# EAGLE board ramanPi_imagingBoard_ccdBoard (EAGLE 6.2)
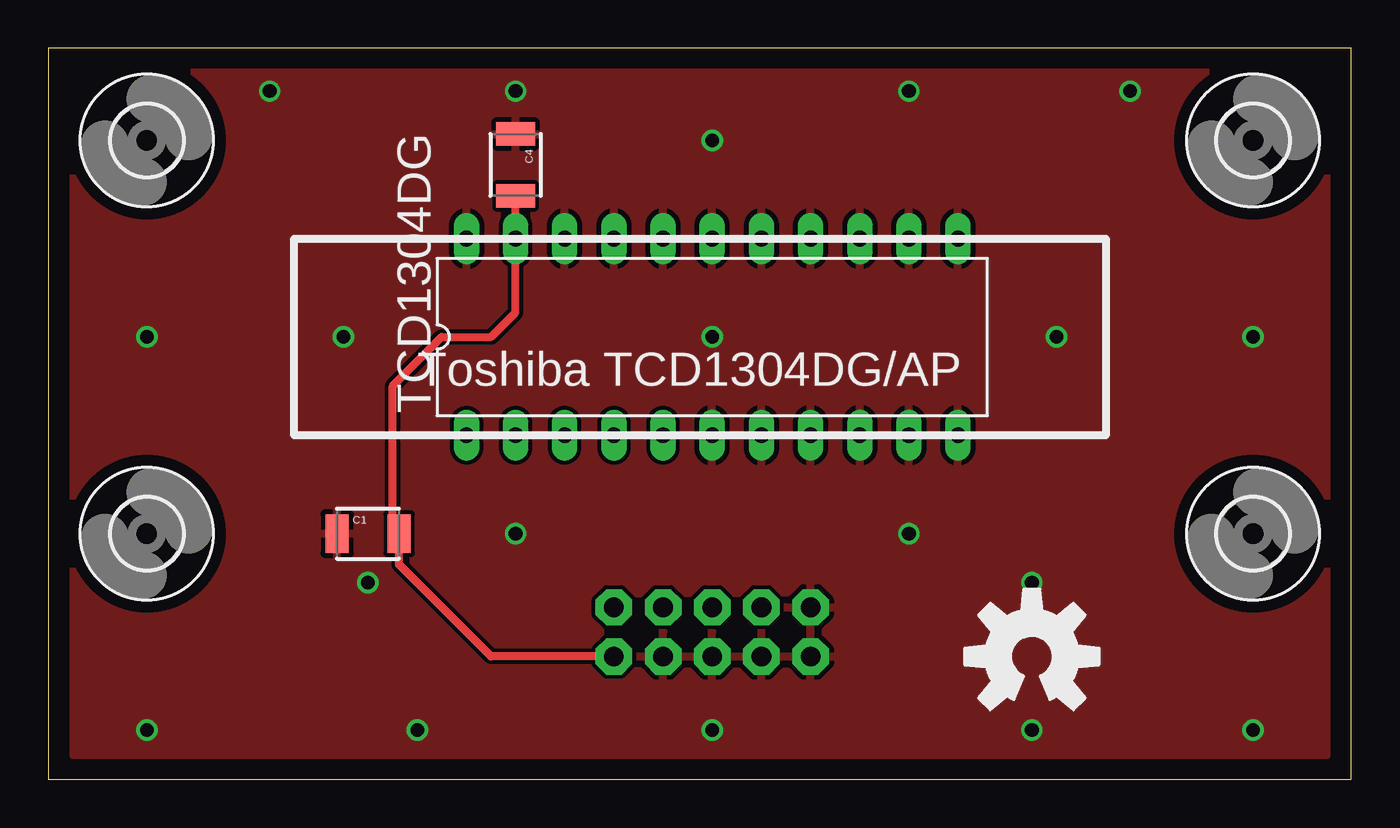
[diagram p0: board, top side]
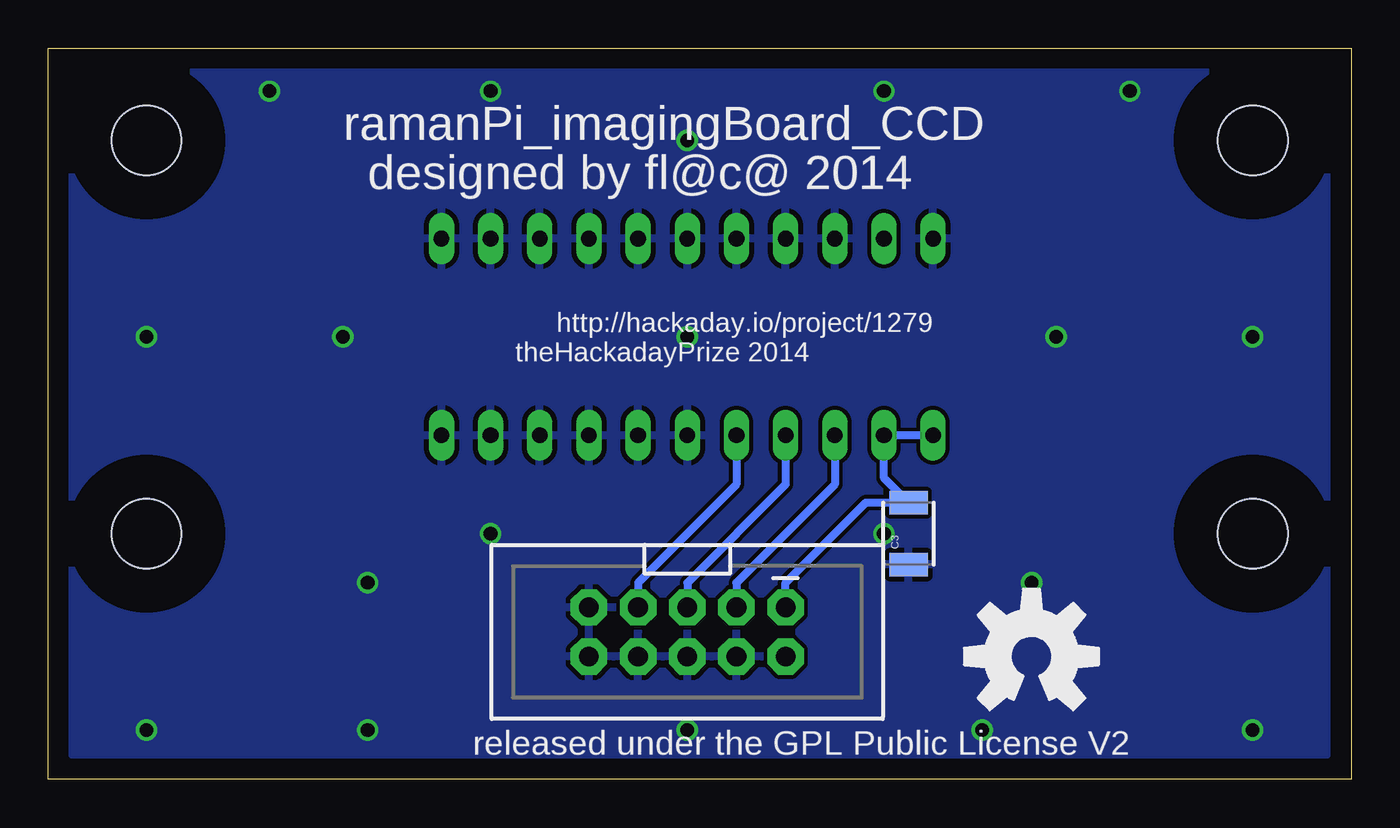
[diagram p1: board, bottom side, seen from below]

Size 67.29 x 37.77 mm. Coordinates in mm from the lower left corner, seen from the top.
Outline: 0,0 67.29,0 67.29,37.77 0,37.77 0,0
Copper layers (1*16): Top 0.035mm / dielectric 1.5mm / Bottom 0.035mm
Design rules: minimum track width 10mil, minimum drill 24mil, track to track 8mil, track to pad 8mil, pad to pad 8mil, via to via 8mil, smd to smd 8mil, copper to edge 40mil, drill to drill 8mil, minimum pad ring 10mil, minimum via ring 8mil, stop-mask expansion 4mil, vias tented up to drill 0mil, thermal gap 10mil

## Footprints (pad centres in the part's own frame; a part is rotated, then mirrored left to right if it is on the bottom)
1210 = smd 1.2 x 2: 1 -1.6,0; 2 1.6,0
3,6 = hole 3.6: 0,0
2X5-SHROUDED = drill 1.016 pad 1.88 octagon: 1 -1.27,5.08; 2 1.27,5.08; 3 -1.27,2.54; 4 1.27,2.54; 5 -1.27,0; 6 1.27,0; 7 -1.27,-2.54; 8 1.27,-2.54; 9 -1.27,-5.08; 10 1.27,-5.08
DIL22-4 = drill 0.813 long: 1 -12.7,-5.08; 2 -10.16,-5.08; 3 -7.62,-5.08; 4 -5.08,-5.08; 5 -2.54,-5.08; 6 0,-5.08; 7 2.54,-5.08; 8 5.08,-5.08; 9 7.62,-5.08; 10 10.16,-5.08; 11 12.7,-5.08; 12 12.7,5.08; 13 10.16,5.08; 14 7.62,5.08; 15 5.08,5.08; 16 2.54,5.08; 17 0,5.08; 18 -2.54,5.08; 19 -5.08,5.08; 20 -7.62,5.08; 21 -10.16,5.08; 22 -12.7,5.08

## Placement (x,y rotation side)
C1  0.1uf  [1210]  16.51,12.7 0 top
C3  0.1uf  [1210]  22.86,12.7 90 bottom
C4  0.1uf  [1210]  24.13,31.75 270 top
H1  MOUNT-HOLE3.6  [3,6]  5.08,33.02 0 top
H2  MOUNT-HOLE3.6  [3,6]  5.08,12.7 0 top
H3  MOUNT-HOLE3.6  [3,6]  62.23,12.7 0 top
H4  MOUNT-HOLE3.6  [3,6]  62.23,33.02 0 top
IMAGINGBOARD  M05X2SHD  [2X5-SHROUDED]  34.29,7.62 270 bottom
TCD1304DG  [DIL22-4]  34.29,22.86 0 top
U$1  [OSHW-LOGO-L]  50.8,6.35 0 top
U$2  [OSHW-LOGO-L]  16.51,6.35 0 bottom

## Library data of the parts
C1 C3 C4 = SparkFun-Passives
H1-H4 = holes
IMAGINGBOARD = SparkFun-Connectors
TCD1304DG = ic-package
U$1 U$2 = SparkFun-Aesthetics

## Nets
5V: C3.2 IMAGINGBOARD.1 TCD1304DG.1 TCD1304DG.2
GND: C1.1 C3.1 C4.1 IMAGINGBOARD.4 IMAGINGBOARD.6 IMAGINGBOARD.8 IMAGINGBOARD.9 IMAGINGBOARD.10 TCD1304DG.6 TCD1304DG.7 TCD1304DG.8 TCD1304DG.9 TCD1304DG.10 TCD1304DG.11 TCD1304DG.12 TCD1304DG.13 TCD1304DG.14 TCD1304DG.15 TCD1304DG.16 TCD1304DG.17 TCD1304DG.18 TCD1304DG.19 TCD1304DG.20 TCD1304DG.22
N$1: C1.2 C4.2 IMAGINGBOARD.2 TCD1304DG.21
N$2: IMAGINGBOARD.5 TCD1304DG.4
N$3: IMAGINGBOARD.7 TCD1304DG.5
N$7: IMAGINGBOARD.3 TCD1304DG.3

## Tracks (layer width: path | path; a pad name or v marks a point on that pad's centre or on a via)
5V
  Bottom 0.406: TCD1304DG.1 TCD1304DG.2 24.13,15.57 C3.2 25.07,14.3 29.21,10.16 IMAGINGBOARD.1
GND  (via drill 0.7)
  other vias: 5.08,22.86 5.08,2.54 16.51,10.16 19.05,2.54 34.29,2.54 50.8,2.54 62.23,2.54 50.8,10.16 44.45,12.7 34.29,22.86 52.07,22.86 15.24,22.86 11.43,35.56 24.13,35.56 34.29,33.02 44.45,35.56 55.88,35.56 24.13,12.7 62.23,22.86
  pour Top: 1.27,36.83 1.27,1.27 66.04,1.27 66.04,36.83
  pour Bottom: 1.27,36.83 1.27,1.27 66.04,1.27 66.04,36.83
N$1
  Top 0.406: 24.13,30.48 C4.2 TCD1304DG.21 24.13,24.13 22.86,22.86 20.32,22.86 17.78,20.32 17.78,13.03 C1.2 18.11,11.1 22.86,6.35 IMAGINGBOARD.2
N$2
  Bottom 0.406: TCD1304DG.4 29.21,15.24 34.29,10.16 IMAGINGBOARD.5
N$3
  Bottom 0.406: TCD1304DG.5 31.75,15.24 36.83,10.16 IMAGINGBOARD.7
N$7
  Bottom 0.406: TCD1304DG.3 26.67,15.24 31.75,10.16 IMAGINGBOARD.3

## Text on the board
tPlace: Toshiba TCD1304DG/AP
bPlace: ramanPi_imagingBoard_CCD | designed by fl@c@ 2014 | http://hackaday.io/project/1279 | theHackadayPrize 2014 | released under the GPL Public License V2